# Altium PCB V2.PcbDoc (part 1 of 2)
Units mm, origin at the board's own origin, x right, y up, seen from the top; angles counter-clockwise.
Board outline 100.28 x 60.38 mm, 2 copper layers (Top Layer, Bottom Layer); 71 components, 64 nets, 307 pads, 74 vias.
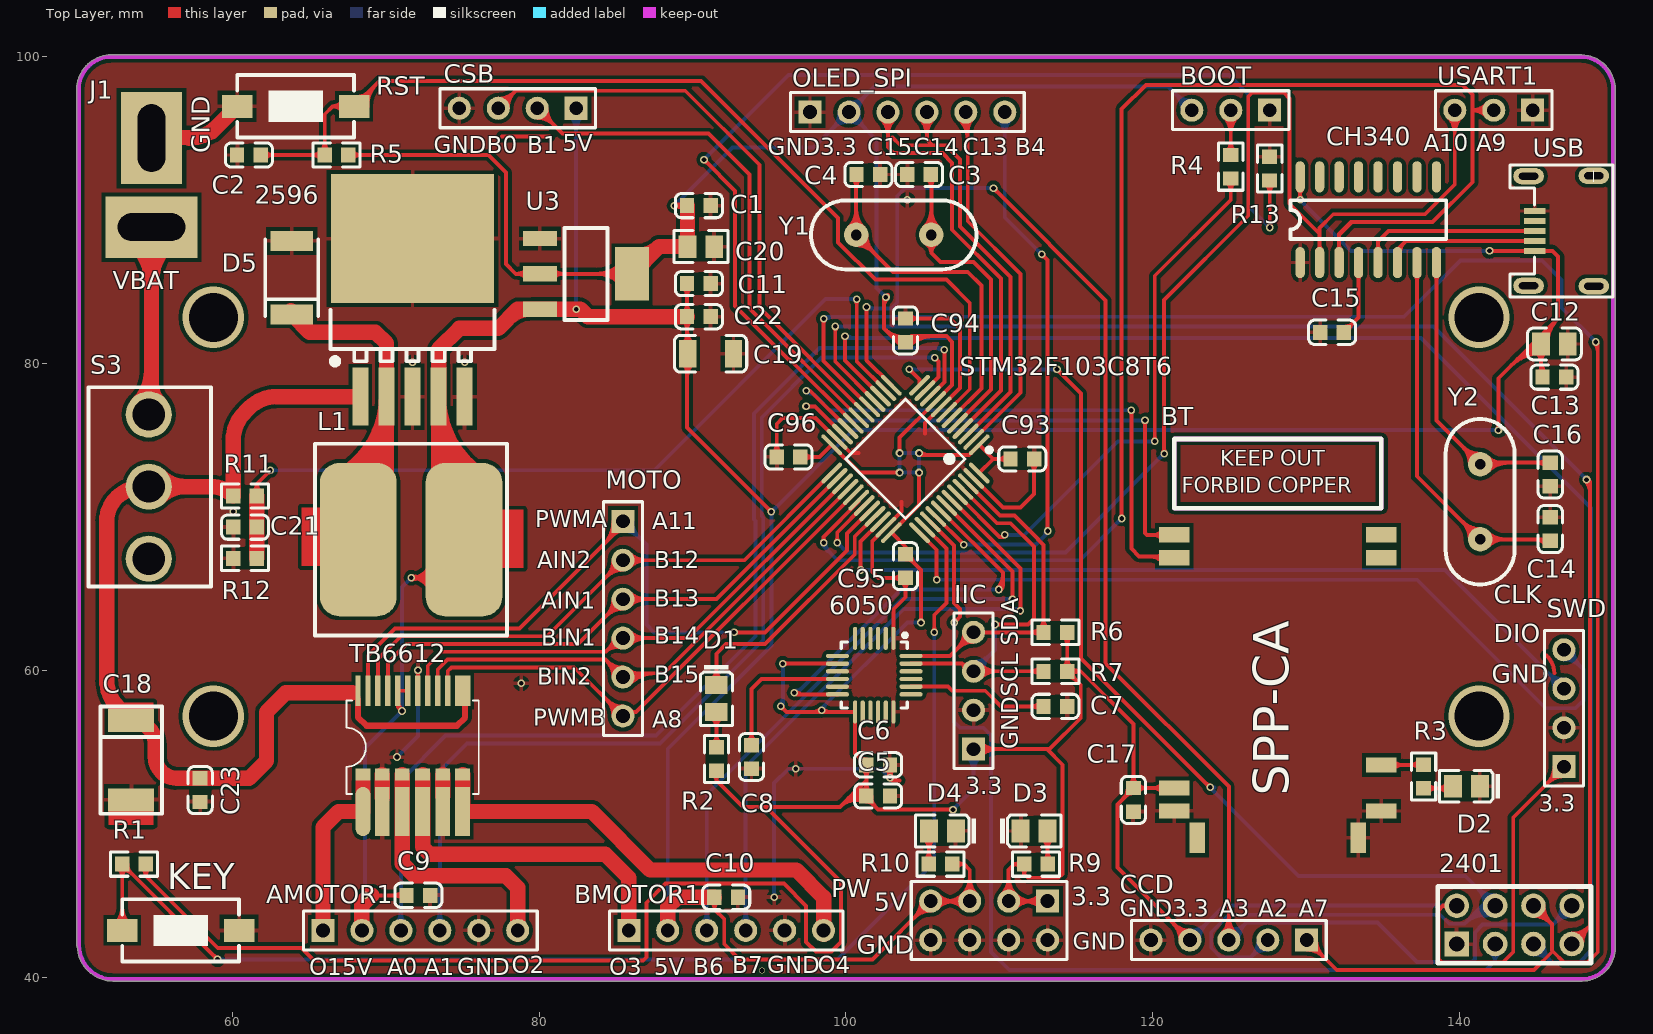
[diagram p0: Top Layer view]
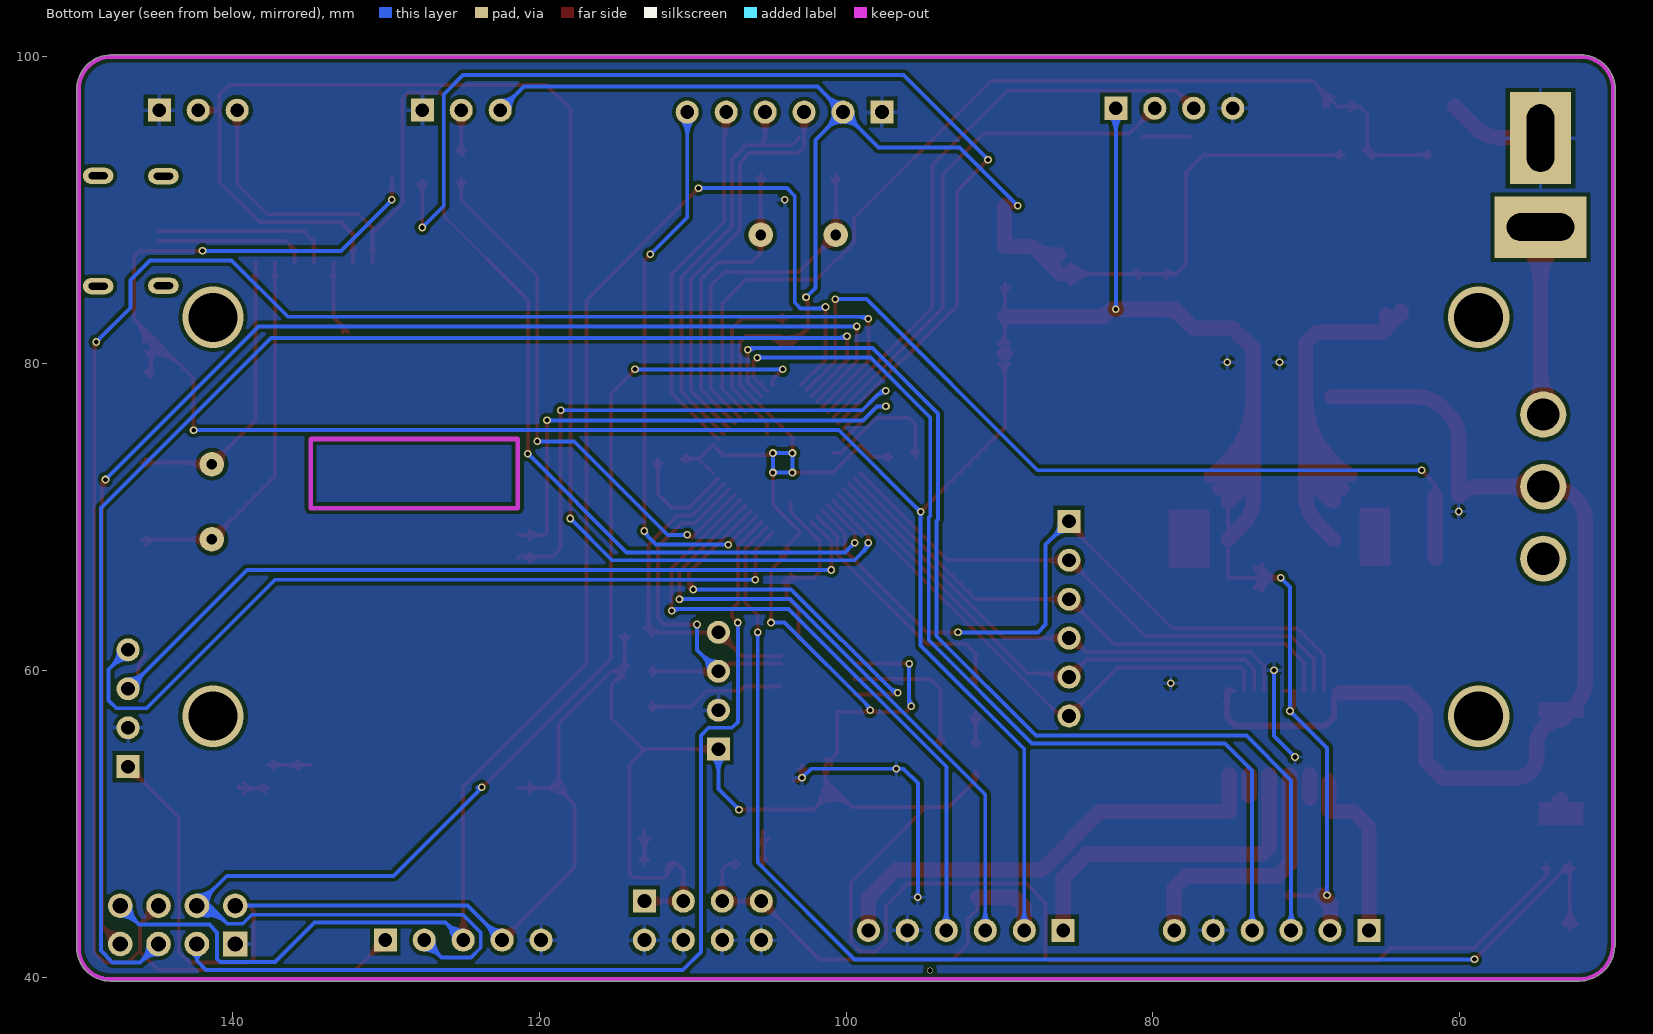
[diagram p1: Bottom Layer view, seen from below]
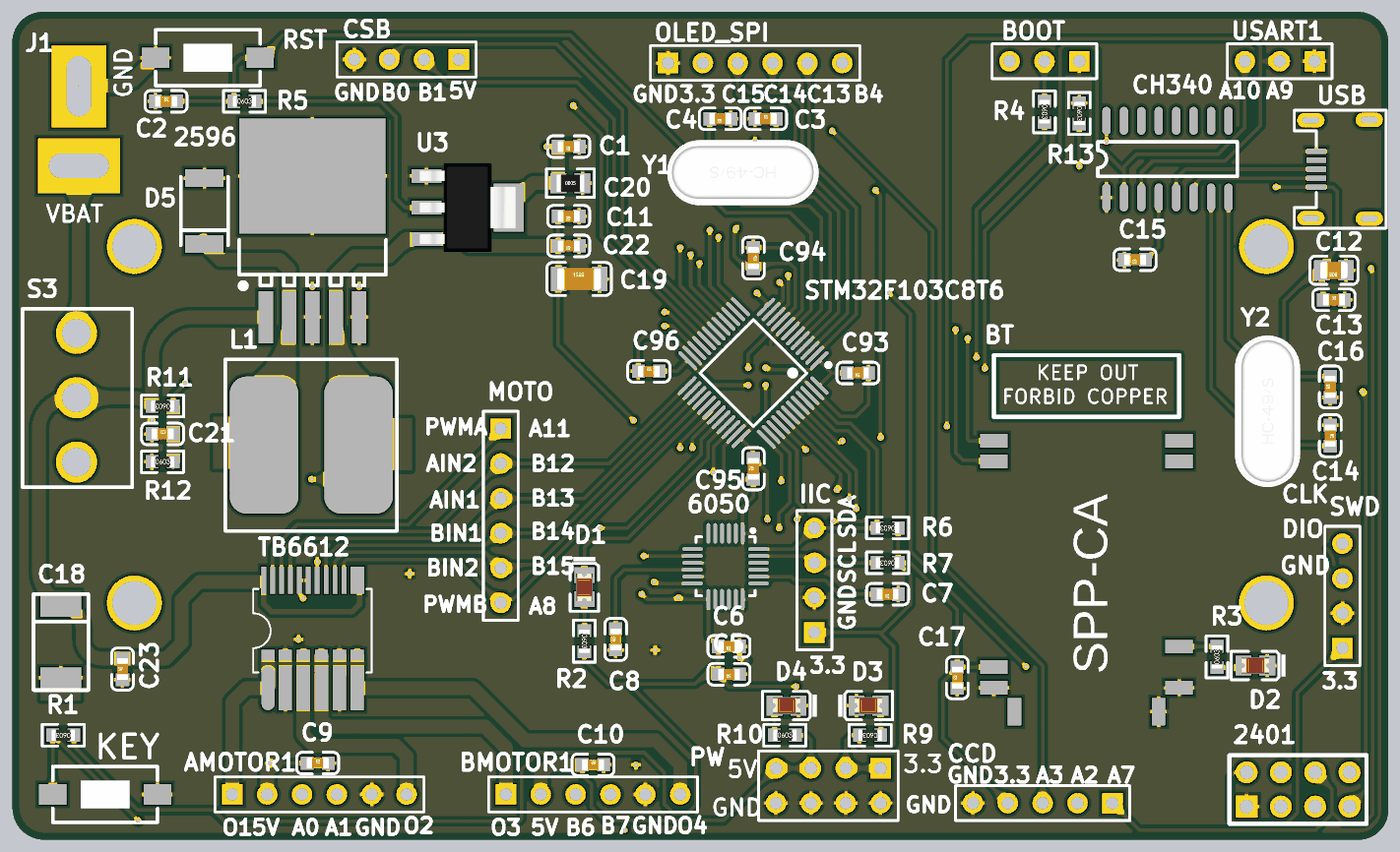
[diagram p3: 3D render of the assembled board from above, using the file's embedded part models]

## Layer stack, top to bottom
Top Layer: signal copper 0.0356
Dielectric: dielectric 0.32, FR-4, Dk 4.8
Bottom Layer: signal copper 0.0356

## Board outline
49.9,41.987 cw(c50,42.066) 49.873,42.066 49.873,97.879 cw(c52.121,97.879) 52.121,100.127 147.955,100.127 cw(c147.955,100) 147.971,100.126 cw(c147.905,97.88) 150.152,97.88 150.152,41.91 cw(c147.993,41.91) 147.993,39.751 cw(c147.993,39.878) 147.992,39.751 52.214,39.751 cw(c52.214,42.066)

## Design rules (kind name [scope] priority, off if disabled: settings)
Clearance [All] p1: gap=0.254
PolygonConnect [All] p1: connectstyle=Relief reliefconductorwidth=0.254 reliefentries=4 polygonreliefangle="90 Angle" airgapwidth=0.254
RoutingVias [All] p1: holewidth=0.3 width=0.5 viastyle="Through Hole" minholewidth=0.3 minwidth=0.5 maxholewidth=0.3 maxwidth=0.5
SolderMaskExpansion [All] p1: expansion=0.102
Width [All] p1: maxlimit=0.254 minlimit=0.254 preferedwidth=0.254
28 further rules are at their usual default settings.

## Components (designator, comment, footprint, x,y, rotation, side; value= is the part's Value field where it differs from the comment)
2401 "NRF24L01" LC-HDR2X4H 139.827,42.164 r90 top (schematic designator 1)
2596 "LM2596t-5v" LC-TO-263-5 71.755,77.851 r270 top (schematic designator 5)
6050 "MPU6050" LC-QFN-24_4x4x05P 101.854,59.69 r180 top (schematic designator 2)
AMOTOR1 "Header 6" HDR1X6 65.913,43.053 r0 top
BMOTOR1 "Header 6" HDR1X6 85.852,43.053 r0 top
BOOT "BOOT" HDR1X3 127.635,96.52 r180 top (schematic designator P1)
BT "SPP-C" SPP-C 121.412,68.834 r0 top (schematic designator BT1)
C1 "" LC-0603_C 90.424,90.297 r180 top
C2 "1uF" LC-0603_C 61.087,93.599 r0 top
C3 "" LC-0603_C 104.775,92.329 r0 top
C4 "" LC-0603_C 101.473,92.329 r180 top
C5 "" LC-0603_C 102.108,51.816 r180 top
C6 "" LC-0603_C 102.108,53.848 r180 top
C7 "" LC-0603_C 113.665,57.658 r180 top
C8 "" LC-0603_C 93.853,54.356 r90 top
C9 "0.1uf" LC-0603_C 72.136,45.339 r0 top
C10 "0.1uf" LC-0603_C 92.202,45.212 r0 top
C11 "0.1uf" LC-0603_C 90.424,85.217 r180 top
C12 "" LC-0805_C 146.191,81.28 r180 top
C13 "" LC-0603_C 146.191,79.121 r0 top
C14 "" LC-0603_C 145.923,69.215 r270 top
C15 "" LC-0603_C 131.699,82.042 r180 top
C16 "" LC-0603_C 145.923,72.771 r90 top
C17 "0.1uf" LC-0603_C 118.745,51.562 r90 top
C18 "Cap Pol1" 100UF钽电容 54.61,57.658 r270 top
C19 "Cap Pol1" LC-1206_C 91.186,80.645 r0 top
C20 "22uf" LC-0805_R 90.551,87.63 r0 top
C21 "0.1uf" LC-0603_C 60.833,69.342 r0 top
C22 "0.1uf" LC-0603_C 90.424,83.058 r180 top
C23 "0.1uf" LC-0603_C 57.912,52.197 r90 top
C93 "Cap" LC-0603_C 111.506,73.787 r180 top
C94 "Cap" LC-0603_C 103.886,82.169 r270 top
C95 "Cap" LC-0603_C 103.886,66.802 r90 top
C96 "Cap" LC-0603_C 96.266,73.914 r0 top
CCD "Header 5" HDR1X5 130.048,42.418 r180 top (schematic designator CCD1)
CH340 "CH340G" SO-16 133.985,86.233 r90 top (schematic designator 4)
CSB "Header 4" HDR1X4 82.423,96.647 r180 top (schematic designator CSB1)
D1 "LED0" LC-0805_LED_S1 91.567,58.166 r270 top
D2 "LED0" LC-0805_LED_S1 140.462,52.451 r180 top
D3 "LED0" LC-0805_LED_S1 112.268,49.53 r0 top
D4 "LED0" LC-0805_LED_S1 106.299,49.53 r180 top
D5 "ES2D" LC-DO-213AB 63.881,85.598 r90 top
IIC "SWD" HDR1X4 108.331,54.864 r90 top (schematic designator SWD1)
J1 "Header 2" VBAT 54.737,88.9 r90 top
KEY "SW-PB" KEY 56.642,43.053 r0 top (schematic designator S1)
L1 "33UH" 330电感 65.405,73.66 r0 top
MOTO "Header 6" HDR1X6 85.471,69.723 r270 top
OLED_SPI "Header 6" HDR1X6 97.663,96.393 r0 top (schematic designator OLED1)
PW "Header 4X2" HDR2X4 113.157,44.958 r180 top
R1 "10K" LC-0603_R 53.594,47.371 r180 top
R2 "" LC-0603_R 91.567,54.229 r270 top
R3 "" LC-0603_R 137.668,53.086 r90 top
R4 "" LC-0603_R 125.095,92.837 r270 top
R5 "10K" LC-0603_R 66.802,93.599 r0 top
R6 "" LC-0603_R 113.665,62.484 r180 top
R7 "" LC-0603_R 113.665,59.944 r180 top
R9 "" LC-0603_R 112.395,47.371 r180 top
R10 "" LC-0603_R 106.172,47.371 r0 top
R11 "10K" LC-0603_R 60.833,71.374 r180 top
R12 "1.5K" LC-0603_R 60.833,67.31 r0 top
R13 "" LC-0603_R 127.635,92.71 r270 top
RST "SW-PB" KEY 64.135,96.774 r0 top (schematic designator S2)
S3 "SW-PB" 钮子开关 54.483,72.009 r270 top
STM32F103C8T6 "STM32F103C8T6" LC-LQFP-48_7x7x05P 103.886,73.787 r135 top (schematic designator U1)
SWD "SWD" HDR1X4 146.812,53.721 r90 top (schematic designator SWD1)
TB6612 "TB6612" TB6612 68.58,50.8 r90 top (schematic designator 3)
U3 "AMS1117_1" LC-SOT-223 83.058,85.852 r180 top
USART1 "Header 3" HDR1X3 144.78,96.52 r180 top (schematic designator CK1)
USB "USB_CONNECTOR" MINI_USB_FEMALE 144.907,88.646 r90 top (schematic designator U2)
Y1 "" LC-HC-49S 103.124,88.392 r180 top
Y2 "" LC-HC-49S 141.351,70.993 r90 top

## Footprints (in the part's own frame and the unit in brackets; to place one, negate y for a bottom-side part, rotate by r counter-clockwise, add the part's x,y. Pads: shape width x height; smd on the part's side, far side on the other; paste and mask are expansions set on the pad)
100UF钽电容 [mm]
  rect 1.5x3 smd: 1(0.914,-1.194) 2(6.096,-1.194)
  silkscreen extent 0,-3.19 7,0.81
330电感 [mm]
  rrect50% 5x10 smd: 1(2.819,-5.131) 2(9.703,-5.131)
  silkscreen extent 0,-11.38 12.5,1.12
HDR1X3 [mm] "Connector; Header; 3 Position"
  rect 1.5x1.5 hole 0.9: 1(0,0)
  round 1.5 hole 0.9: 2(2.54,0) 3(5.08,0)
  silkscreen extent -1.27,-1.27 6.35,1.27
HDR1X4 [mm] "Connector; Header; 4 Position"
  rect 1.5x1.5 hole 0.9: 1(0,0)
  round 1.5 hole 0.9: 2(2.54,0) 3(5.08,0) 4(7.62,0)
  silkscreen extent -1.27,-1.27 8.89,1.27
HDR1X5 [mm] "Connector; Header; 5 Position"
  rect 1.5x1.5 hole 0.9: 1(0,0)
  round 1.5 hole 0.9: 2(2.54,0) 3(5.08,0) 4(7.62,0) 5(10.16,0)
  silkscreen extent -1.27,-1.27 11.43,1.27
HDR1X6 [mm] "Connector; Header; 6 Position"
  rect 1.5x1.5 hole 0.9: 1(0,0)
  round 1.5 hole 0.9: 2(2.54,0) 3(5.08,0) 4(7.62,0) 5(10.16,0) 6(12.7,0)
  silkscreen extent -1.27,-1.27 13.97,1.27
HDR2X4 [mm] "Connector; Header; 4x2 Position"
  rect 1.5x1.5 hole 0.9: 1(0,0)
  round 1.5 hole 0.9: 2(0,2.54) 3(2.54,0) 4(2.54,2.54) 5(5.08,0) 6(5.08,2.54) 7(7.62,0) 8(7.62,2.54)
  silkscreen extent -1.27,-1.27 8.89,3.81
KEY [mm]
  rect 2x1.5 smd: 1(-3.81,0) 2(3.81,0)
  silkscreen extent -3.81,-2.03 3.81,2.03
LC-0603_C [mm]
  rect 0.93x0.98 smd: 1(-0.77,0) 2(0.77,0)
  silkscreen extent -1.54,-0.79 1.54,0.79, body extent -0.8,-0.4 0.8,0.4, height 0.3
LC-0603_R [mm]
  rect 0.93x0.98 smd: 1(-0.77,0) 2(0.77,0)
  silkscreen extent -1.54,-0.79 1.54,0.79, body extent -0.85,-0.4 0.85,0.4, height 0.56
LC-0805_C [mm]
  rect 1.16x1.47 smd: 1(-0.875,0) 2(0.875,0)
  silkscreen extent -1.76,-1.03 1.76,1.04, body extent -1,-0.62 1,0.63, height 0.77
LC-0805_LED_S1 [mm]
  rect 1.16x1.47 smd: 1(0.875,0) 2(-0.875,0)
  silkscreen extent -2.2,-1.03 1.75,1.03, body extent -1.01,-0.62 1.01,0.62, height 1.1
LC-0805_R [mm]
  rect 1.16x1.47 smd: 1(-0.875,0) 2(0.875,0)
  silkscreen extent -1.75,-1.03 1.75,1.03, body extent -1,-0.62 1,0.63, height 0.49
LC-1206_C [mm]
  rect 1.13x1.8 smd: 1(-1.49,0) 2(1.49,0)
  silkscreen extent -2.36,-1.2 2.35,1.2, body extent -1.6,-0.81 1.6,0.79, height 1
LC-DO-213AB [mm]
  rect 1.3x2.8 smd: 1(2.4,0) 2(-2.4,0)
  silkscreen extent -2.5,-1.73 2.5,1.73
LC-HC-49S [mm]
  round 1.6 hole 0.7: 1(-2.45,0) 2(2.45,0)
  silkscreen extent -5.39,-2.25 5.39,2.25, body extent -5.39,-2.27 5.41,2.23, height 3.6
LC-HDR2X4H [mm]
  rect 1.6x1.6 hole 1: 1(0,0)
  round 1.6 hole 1: 2(2.5,0) 3(0,-2.5) 4(2.5,-2.5) 5(0,-5) 6(2.5,-5) 7(0,-7.5) 8(2.5,-7.5)
  silkscreen extent -1.25,-8.75 3.75,1.25
LC-LQFP-48_7x7x05P [mm]
  oval 0.28x1.8 smd mask+0.051: 1(-2.75,-4.05) 2(-2.25,-4.05) 3(-1.75,-4.05) 4(-1.25,-4.05) 5(-0.75,-4.05) 6(-0.25,-4.05) 7(0.25,-4.05) 8(0.75,-4.05) 9(1.25,-4.05) 10(1.75,-4.05) 11(2.25,-4.05) 12(2.75,-4.05) 25(2.75,4.05) 26(2.25,4.05) 27(1.75,4.05) 28(1.25,4.05) 29(0.75,4.05) 30(0.25,4.05) 31(-0.25,4.05) 32(-0.75,4.05) 33(-1.25,4.05) 34(-1.75,4.05) 35(-2.25,4.05) 36(-2.75,4.05)
  oval 1.8x0.28 smd mask+0.051: 13(4.05,-2.75) 14(4.05,-2.25) 15(4.05,-1.75) 16(4.05,-1.25) 17(4.05,-0.75) 18(4.05,-0.25) 19(4.05,0.25) 20(4.05,0.75) 21(4.05,1.25) 22(4.05,1.75) 23(4.05,2.25) 24(4.05,2.75) 37(-4.05,2.75) 38(-4.05,2.25) 39(-4.05,1.75) 40(-4.05,1.25) 41(-4.05,0.75) 42(-4.05,0.25) 43(-4.05,-0.25) 44(-4.05,-0.75) 45(-4.05,-1.25) 46(-4.05,-1.75) 47(-4.05,-2.25) 48(-4.05,-2.75)
  silkscreen extent -3.6,-4.42 2.75,2.75
LC-QFN-24_4x4x05P [mm]
  oval 0.28x1.5 smd mask+0.051: 1(-1.25,-2.4) 2(-0.75,-2.4) 3(-0.25,-2.4) 4(0.25,-2.4) 5(0.75,-2.4) 6(1.25,-2.4) 13(1.25,2.4) 14(0.75,2.4) 15(0.25,2.4) 16(-0.25,2.4) 17(-0.75,2.4) 18(-1.25,2.4)
  oval 1.5x0.28 smd mask+0.051: 7(2.4,-1.25) 8(2.4,-0.75) 9(2.4,-0.25) 10(2.4,0.25) 11(2.4,0.75) 12(2.4,1.25) 19(-2.4,1.25) 20(-2.4,0.75) 21(-2.4,0.25) 22(-2.4,-0.25) 23(-2.4,-0.75) 24(-2.4,-1.25)
  silkscreen extent -2.15,-2.72 2.15,2.15
LC-SOT-223 [mm]
  rect 2.2x1 smd: 1(3,-2.3) 2(3,0) 3(3,2.3)
  rect 2.2x3.5 smd: 2(-3,0)
  silkscreen extent -1.4,-3 1.4,3, body extent -3.49,-3.24 3.49,3.24, height 1.64
LC-TO-263-5 [mm]
  rect 8.4x10.65 smd: 0(-10.3,0)
  rect 3.8x1.05 smd: 1(0,-3.4) 2(0,-1.7) 3(0,0) 4(0,1.7) 5(0,3.4)
  silkscreen extent -5.65,-5.35 -2.1,5.35
MINI_USB_FEMALE [mm]
  rect 0.4x1.4 smd: 1(-1.3,0) 2(-0.65,0) 3(0,0) 4(0.65,0) 5(1.3,0)
  oval 1.05x2 hole 0.45 slot 1.25 at 90 deg: 6(-3.57,0.4) 7(-3.6,-3.86) 8(3.6,-3.86) 9(3.57,0.4)
  silkscreen extent -4.3,-5.1 4.3,1.6
SO-16 [mil]
  oval 80x24 smd: 1(14,172) 2(14,122) 3(14,72) 4(14,22) 5(14,-28) 6(14,-78) 7(14,-128) 8(14,-178) 9(234,-178) 10(234,-128) 11(234,-78) 12(234,-28) 13(234,22) 14(234,72) 15(234,122) 16(234,172)
  silkscreen extent 74,-203 174,197
SPP-C [mm]
  rect 2x1 smd: 1(0,0) 2(0,-1.5) 12(0,-16.5) 13(0,-18) 22(13.5,-18) 24(13.5,-15) 33(13.5,-1.5) 34(13.5,0)
  rect 1x2 smd: 14(1.5,-19.75) 21(12,-19.75)
  Keep-Out Layer lines w0.3: 0,1.75 13.5,1.75 13.5,6.25 0,6.25 0,1.75
  silkscreen extent 0,1.75 13.5,6.25
TB6612 [mm]
  oval 3.2x0.96 smd: 1(0,0.056)
  rect 0.8x0.96 smd: 2(2.413,0.056) 4(2.413,-1.192) 6(2.413,-2.511) 8(2.413,-3.831) 10(2.413,-5.15) 12(2.413,-6.439)
  rect 3.2x0.96 smd: 3(0,-1.192) 5(0,-2.511) 7(0,-3.831) 9(0,-5.15) 11(0,-6.439)
  rect 2x0.7 smd: 13(7.874,-6.604)
  rect 2x0.35 smd: 14(7.874,-6.119) 15(7.874,-5.469) 16(7.874,-4.819) 17(7.874,-4.169) 18(7.874,-3.519) 19(7.874,-2.869) 20(7.874,-2.219) 21(7.874,-1.569) 22(7.874,-0.919) 23(7.874,-0.269) 24(7.874,0.381)
  silkscreen extent 1.14,-7.49 7.24,1.14
VBAT [mm]
  rect 4x6 hole 1.8 slot 4.4 at 90 deg: 1(0,0)
  rect 6x4 hole 1.8 slot 4.4 at 0 deg: 2(5.8,0)
钮子开关 [mm]
  round 3 hole 2.1: 1(-4.674,0.076) 2(0.025,0.076) 3(4.724,0.076)
  silkscreen extent -6.45,-3.86 6.55,4.14

## Part data
2401: library part "Header 4X2H", "Header, 4-Pin, Dual row, Right Angle"
2596: library part LM2576, "Simple Switcher 3A Step Down Voltage Regulator"
6050: "9轴运动处理传感器"
AMOTOR1 BMOTOR1 MOTO OLED_SPI: "Header, 6-Pin"
BOOT: library part "Header 3", "Header, 3-Pin"
BT: "sppc"
C1 C3 C4 C12 C13 C14 C15 C16: library part C
C2: library part C_1
C5 C6 C7 C8: library part Cap, "Capacitor"
C9 C10 C11 C17 C21 C22 C23: library part cap
C18 C19: "Polarized Capacitor (Radial)"
C20: library part "Cap Pol2", "Polarized Capacitor (Axial)"
C93 C94 C95 C96: "Capacitor"
CCD: "Header, 5-Pin"
CSB: "Header, 4-Pin"
D1 D2 D3 D4: "Typical INFRARED GaAs LED"
D5: library part DIODE
IIC SWD: library part "Header 4", "Header, 4-Pin"
J1: "Header, 2-Pin"
KEY RST S3: "Switch"
L1: library part Inductor
PW: "Header, 4-Pin, Dual row"
R1 R2 R3 R5 R6 R7 R9 R10: library part R_1
R4 R13: library part R
R11 R12: library part res
STM32F103C8T6: "STM32 ARM-based 32-bit MCU with 64 Kbytes Flash, 48-pin LQFP, Industrial Temperature"
U3: "3.3V电压转换器AMS1117"
USART1: "Header, 3-Pin"
Y1 Y2: library part XTAL, "Crystal Oscillator"

## Via types
v1: diameter 0.5, hole 0.3, Top Layer to Bottom Layer, 69 vias
v2: diameter 4, hole 3.2, Top Layer to Bottom Layer, 4 vias
v3: diameter 0.4, hole 0.3, Top Layer to Bottom Layer, 1 vias

## Nets (pads, with @x,y where several pads share a name; then routed paths per layer and width w, separated by ;. In a path a pad name is that pad's centre, name@x,y a point inside that pad or via, vN(x,y) a via of type N, cw(c..) or ccw(c..) an arc to the next point about the centre after c; other vN are vias at no path point)
5V: 
12V: 2596.1 C18.1 C23.2 R11.2 S3.2 TB6612.13 TB6612.14 TB6612.24 | length 210.6
  Top Layer w0.254: TB6612.24@68.199,58.166 67.818,58.547 67.818,58.623 68.199,58.623 TB6612.24@68.199,58.674 ; TB6612.13@75.184,58.674 TB6612.14@74.699,58.674 ; TB6612.14@74.699,58.674 cw(c74.699,58.258) 75.015,58.529 ccw(c74.699,58.258) TB6612.14@74.699,58.674 ; TB6612.14@74.699,58.674 ccw(c74.699,59.09) 75.015,58.819 cw(c74.699,59.09) TB6612.14@74.699,58.674 ; 75.184,57.486 cw(c75.722,57.486) 75.342,57.866 ccw(c75.722,57.486) 75.184,57.486 ; 75.184,57.486 ccw(c74.646,57.486) 75.026,57.866 cw(c74.646,57.486) 75.184,57.486 ; 67.96,58.623 ccw(c67.96,58.913) 68.165,58.708 cw(c67.96,58.913) 67.96,58.623
  Top Layer w0.4: TB6612.24@68.199,58.166 68.199,56.947 68.758,56.388 74.651,56.388 75.184,56.921 TB6612.13@75.184,58.674
  Top Layer w1: 67.818,58.547 63.5,58.547 62.23,57.277 62.23,54.102 61.095,52.967 C23.2@57.912,52.967 56.38,52.967 ; 2596.1@68.355,77.851 62.901,77.851 ; 51.816,59.396 ccw(c54.356,59.396) 52.56,57.6 ; 51.816,59.396 ccw(c54.356,59.396) 52.56,57.6 ; 51.816,59.396 ccw(c54.356,59.396) 52.56,57.6 ; 51.816,59.396 ccw(c54.356,59.396) 52.56,57.6 ; 51.816,59.396 ccw(c54.356,59.396) 52.56,57.6 ; 51.816,59.396 ccw(c54.356,59.396) 52.56,57.6 ; 51.816,59.396 ccw(c54.356,59.396) 52.56,57.6 ; 51.816,59.396 ccw(c54.356,59.396) 52.56,57.6 ; 51.816,59.396 51.816,69.724 ; 51.816,59.396 51.816,69.724 ; 51.816,69.724 cw(c53.959,69.724) 52.444,71.24 ; 51.816,69.724 cw(c53.959,69.724) 52.444,71.24 ; 51.816,69.724 cw(c53.959,69.724) 52.444,71.24 ; 51.816,69.724 cw(c53.959,69.724) 52.444,71.24 ; 51.816,69.724 cw(c53.959,69.724) 52.444,71.24 ; 51.816,69.724 cw(c53.959,69.724) 52.444,71.24 ; 51.816,69.724 cw(c53.959,69.724) 52.444,71.24 ; 51.816,69.724 cw(c53.959,69.724) 52.444,71.24 ; 52.444,71.24 cw(c54.24,69.444) S3.2@54.24,71.984 ; 52.444,71.24 cw(c54.24,69.444) S3.2@54.24,71.984 ; 52.444,71.24 cw(c54.24,69.444) S3.2@54.24,71.984 ; 52.444,71.24 cw(c54.24,69.444) S3.2@54.24,71.984 ; 52.444,71.24 cw(c54.24,69.444) S3.2@54.24,71.984 ; 52.444,71.24 cw(c54.24,69.444) S3.2@54.24,71.984 ; 52.444,71.24 cw(c54.24,69.444) S3.2@54.24,71.984 ; 52.444,71.24 cw(c54.24,69.444) S3.2@54.24,71.984 ; 52.56,57.6 C18.1@53.416,56.744 ; C18.1@53.416,56.744 cw(c53.416,55.169) 54.991,55.169 ; C18.1@53.416,56.744 cw(c53.416,55.169) 54.991,55.169 ; C18.1@53.416,56.744 cw(c53.416,55.169) 54.991,55.169 ; C18.1@53.416,56.744 cw(c53.416,55.169) 54.991,55.169 ; C18.1@53.416,56.744 cw(c53.416,55.169) 54.991,55.169 ; C18.1@53.416,56.744 cw(c53.416,55.169) 54.991,55.169 ; C18.1@53.416,56.744 cw(c53.416,55.169) 54.991,55.169 ; C18.1@53.416,56.744 cw(c53.416,55.169) 54.991,55.169 ; S3.2@54.24,71.984 S3.2@54.559,71.984 ; S3.2@54.559,71.984 58.591,71.984 ; S3.2@54.559,71.984 58.591,71.984 ; 54.991,54.356 ccw(c56.38,54.356) 56.38,52.967 ; 54.991,54.356 ccw(c56.38,54.356) 56.38,52.967 ; 54.991,54.356 ccw(c56.38,54.356) 56.38,52.967 ; 54.991,54.356 ccw(c56.38,54.356) 56.38,52.967 ; 54.991,54.356 ccw(c56.38,54.356) 56.38,52.967 ; 54.991,54.356 ccw(c56.38,54.356) 56.38,52.967 ; 54.991,54.356 ccw(c56.38,54.356) 56.38,52.967 ; 54.991,54.356 ccw(c56.38,54.356) 56.38,52.967 ; 54.991,54.356 54.991,55.169 ; 56.973,71.984 cw(c56.973,74.398) 55.266,72.691 ccw(c56.973,74.398) 56.973,71.984 ; 56.973,71.984 ccw(c56.973,69.569) 55.266,71.276 cw(c56.973,69.569) 56.973,71.984 ; 58.591,71.984 cw(c58.591,69.902) R11.2@60.063,71.374 ; 58.591,71.984 cw(c58.591,69.902) R11.2@60.063,71.374 ; 58.591,71.984 cw(c58.591,69.902) R11.2@60.063,71.374 ; 58.591,71.984 cw(c58.591,69.902) R11.2@60.063,71.374 ; 58.591,71.984 cw(c58.591,69.902) R11.2@60.063,71.374 ; 58.591,71.984 cw(c58.591,69.902) R11.2@60.063,71.374 ; 58.591,71.984 cw(c58.591,69.902) R11.2@60.063,71.374 ; 58.591,71.984 cw(c58.591,69.902) R11.2@60.063,71.374 ; R11.2@60.063,71.374 60.063,75.013 ; R11.2@60.063,71.374 60.063,75.013 ; 60.063,75.013 cw(c62.603,75.013) 60.807,76.809 ; 60.063,75.013 cw(c62.603,75.013) 60.807,76.809 ; 60.063,75.013 cw(c62.603,75.013) 60.807,76.809 ; 60.063,75.013 cw(c62.603,75.013) 60.807,76.809 ; 60.063,75.013 cw(c62.603,75.013) 60.807,76.809 ; 60.063,75.013 cw(c62.603,75.013) 60.807,76.809 ; 60.063,75.013 cw(c62.603,75.013) 60.807,76.809 ; 60.063,75.013 cw(c62.603,75.013) 60.807,76.809 ; 60.807,76.809 61.105,77.107 ; 61.105,77.107 cw(c62.901,75.311) 62.901,77.851 ; 61.105,77.107 cw(c62.901,75.311) 62.901,77.851 ; 61.105,77.107 cw(c62.901,75.311) 62.901,77.851 ; 61.105,77.107 cw(c62.901,75.311) 62.901,77.851 ; 61.105,77.107 cw(c62.901,75.311) 62.901,77.851 ; 61.105,77.107 cw(c62.901,75.311) 62.901,77.851 ; 61.105,77.107 cw(c62.901,75.311) 62.901,77.851 ; 61.105,77.107 cw(c62.901,75.311) 62.901,77.851
AIN1: MOTO.3 STM32F103C8T6.26 TB6612.21 | length 43.6
  Top Layer w0.254: TB6612.21@70.149,58.674 70.149,60.497 71.374,61.722 82.55,61.722 MOTO.3@85.471,64.643 91.56,64.643 STM32F103C8T6.26@99.431,72.514 ; MOTO.3@84.848,64.643 cw(c83.344,64.643) 84.407,63.579 cw(c85.471,62.516) MOTO.3@85.471,64.02 ; MOTO.3@85.102,64.643 cw(c84.211,64.643) 84.841,64.013 cw(c85.471,63.383) MOTO.3@85.471,64.274 ; MOTO.3@85.732,64.382 cw(c86.362,63.752) 86.362,64.643 cw(c86.362,65.534) MOTO.3@85.732,64.904 ; MOTO.3@85.912,64.202 cw(c86.975,63.139) 86.975,64.643 cw(c86.975,66.147) MOTO.3@85.912,65.084
AIN2: MOTO.2 STM32F103C8T6.25 TB6612.22 | length 44.2
  Top Layer w0.254: TB6612.22@69.499,58.674 69.499,60.736 70.993,62.23 80.518,62.23 MOTO.2@85.471,67.183 93.393,67.183 STM32F103C8T6.25@99.078,72.868 ; MOTO.2@84.848,67.183 cw(c83.344,67.183) 84.407,66.119 cw(c85.471,65.056) MOTO.2@85.471,66.56 ; MOTO.2@85.102,67.183 cw(c84.211,67.183) 84.841,66.553 cw(c85.471,65.923) MOTO.2@85.471,66.814 ; MOTO.2@85.732,66.922 cw(c86.362,66.292) 86.362,67.183 cw(c86.362,68.074) MOTO.2@85.732,67.444 ; MOTO.2@85.912,66.742 cw(c86.975,65.679) 86.975,67.183 cw(c86.975,68.687) MOTO.2@85.912,67.624
BIN1: MOTO.4 STM32F103C8T6.27 TB6612.17 | length 39.9
  Top Layer w0.254: TB6612.17@72.749,58.674 72.749,60.303 73.66,61.214 84.328,61.214 ; 84.587,61.473 ccw(c83.957,62.103) MOTO.4@84.848,62.103 ; 84.65,61.536 cw(c85.204,60.981) MOTO.4@85.386,61.744 ; MOTO.4@85.327,61.497 ccw(c85.081,60.461) 84.328,61.214 ; MOTO.4@85.732,61.842 cw(c86.362,61.212) 86.362,62.103 cw(c86.362,62.994) MOTO.4@85.732,62.364 ; MOTO.4@85.912,61.662 cw(c86.975,60.599) 86.975,62.103 cw(c86.975,63.607) MOTO.4@85.912,62.544 ; STM32F103C8T6.27@99.785,72.161 89.727,62.103 MOTO.4@85.471,62.103 85.217,62.103 84.328,61.214
BIN2: MOTO.5 STM32F103C8T6.28 TB6612.16 | length 42.3
  Top Layer w0.254: TB6612.16@73.399,58.674 73.399,60.064 74.041,60.706 84.328,60.706 MOTO.5@85.471,59.563 85.725,59.817 88.148,59.817 STM32F103C8T6.28@100.138,71.807 ; MOTO.5@84.848,59.563 ccw(c83.344,59.563) 84.407,60.627 ccw(c85.471,61.69) MOTO.5@85.471,60.186 ; MOTO.5@85.102,59.563 ccw(c84.211,59.563) 84.841,60.193 ccw(c85.471,60.823) MOTO.5@85.471,59.932 ; MOTO.5@85.552,59.482 cw(c86.362,58.672) 86.362,59.817 cw(c86.362,60.454) MOTO.5@85.912,60.004 ; MOTO.5@85.732,59.302 cw(c86.975,58.059) 86.975,59.817 ; MOTO.5@85.912,59.122 cw(c87.588,57.446) 87.588,59.817
BOOT0: R4.2 STM32F103C8T6.44 | length 39.8
  Top Layer w0.254: STM32F103C8T6.44@107.28,71.454 110.027,68.707 110.236,68.707 v1(110.363,68.834) ; v1(120.142,74.93) 120.142,85.725 125.095,90.678 R4.2@125.095,92.067 ; R4.2@124.856,91.828 cw(c124.279,91.251) 125.095,91.251 cw(c125.911,91.251) R4.2@125.334,91.828 ; 120.142,75.227 cw(c119.845,75.227) 120.055,75.017 ccw(c119.845,75.227) 120.142,75.227 ; 120.142,75.227 ccw(c120.439,75.227) 120.229,75.017 cw(c120.439,75.227) 120.142,75.227
  Bottom Layer w0.254: v1(110.363,68.834) 111.633,68.834 117.729,74.93 v1(120.142,74.93) ; 110.66,68.834 cw(c110.66,69.131) 110.45,68.921 ccw(c110.66,69.131) 110.66,68.834 ; 110.66,68.834 ccw(c110.66,68.537) 110.45,68.747 cw(c110.66,68.537) 110.66,68.834 ; 119.845,74.93 cw(c119.845,74.633) 120.055,74.843 ccw(c119.845,74.633) 119.845,74.93 ; 119.845,74.93 ccw(c119.845,75.227) 120.055,75.017 cw(c119.845,75.227) 119.845,74.93
BOOT1: R13.2 STM32F103C8T6.20 | length 76.9
  Top Layer w0.254: v1(90.754,93.294) 92.786,91.262 92.786,83.744 96.266,80.264 96.348,80.264 STM32F103C8T6.20@100.492,76.12 ; R13.2@127.396,91.701 cw(c126.819,91.124) 127.635,91.124 cw(c128.451,91.124) R13.2@127.874,91.701 ; v1(127.635,88.875) R13.2@127.635,91.94 ; 90.964,93.084 cw(c91.174,93.294) 90.877,93.294 ccw(c91.174,93.294) 90.964,93.084 ; 90.964,93.084 ccw(c90.754,92.874) 90.754,93.171 cw(c90.754,92.874) 90.964,93.084 ; 127.635,89.172 cw(c127.338,89.172) 127.548,88.962 ccw(c127.338,89.172) 127.635,89.172 ; 127.635,89.172 ccw(c127.932,89.172) 127.722,88.962 cw(c127.932,89.172) 127.635,89.172
  Bottom Layer w0.254: v1(90.754,93.294) 96.266,98.806 124.968,98.806 126.238,97.536 126.238,90.272 v1(127.635,88.875) ; 90.964,93.504 cw(c90.754,93.714) 90.754,93.417 ccw(c90.754,93.714) 90.964,93.504 ; 90.964,93.504 ccw(c91.174,93.294) 90.877,93.294 cw(c91.174,93.294) 90.964,93.504 ; 127.425,89.085 cw(c127.215,88.875) 127.512,88.875 ccw(c127.215,88.875) 127.425,89.085 ; 127.425,89.085 ccw(c127.635,89.295) 127.635,88.998 cw(c127.635,89.295) 127.425,89.085
DGND: 
GND: 2401.1 2596.0 2596.3 2596.5 6050.1 6050.9 6050.11 6050.18 AMOTOR1.5 BMOTOR1.5 BOOT.1 BT.13 BT.21 BT.22 C1.1 C2.1 C3.1 C4.1 C5.1 C6.1 C7.1 C8.1 C9.2 C10.2 C11.1 C12.1 C13.2 C14.1 C15.2 C16.1 C17.1 C18.2 C19.2 C20.2 C21.1 C22.1 C23.1 C93.1 C94.1 C95.1 C96.1 CCD.5 CH340.1 CSB.4 D2.2 D3.2 D4.2 D5.1 IIC.2 J1.2 KEY.2 OLED_SPI.1 PW.2 PW.4 PW.6 PW.8 R12.1 R13.1 RST.1 STM32F103C8T6.8 STM32F103C8T6.23 STM32F103C8T6.35 STM32F103C8T6.47 SWD.2 TB6612.3 TB6612.4 TB6612.9 TB6612.10 TB6612.18 U3.1 USART1.1 USB.5 | length 113.6
  Top Layer w0.254: TB6612.18@72.099,58.674 v1@72.099,60.009 ; C96.1@95.496,73.914 95.496,76.065 95.885,76.454 98.037,76.454 STM32F103C8T6.23@99.431,75.06 100.323,74.168 100.838,74.168 ; C6.1@102.878,53.848 v1(102.878,53.01) ; v1@102.946,52.907 cw(c103.082,52.702) 103.228,52.9 ; 6050.1@103.104,62.09 103.104,63.988 103.886,64.77 C95.1@103.886,66.032 102.116,66.032 101.727,66.421 101.727,68.446 STM32F103C8T6.35@102.613,69.332 103.632,70.351 103.632,70.993 ; C94.1@103.886,82.939 106.799,82.939 107.442,82.296 107.442,78.404 STM32F103C8T6.8@106.219,77.181 105.156,76.118 105.156,75.438 ; STM32F103C8T6.47@108.341,72.514 108.352,72.514 110.254,70.612 111.379,70.612 112.276,71.509 C93.1@112.276,73.787 ; 95.496,74.755 cw(c94.68,74.755) 95.257,74.178 ccw(c94.68,74.755) 95.496,74.755 ; 95.496,74.755 ccw(c96.312,74.755) 95.735,74.178 cw(c96.312,74.755) 95.496,74.755 ; v1@102.771,53.071 ccw(c102.514,53.22) 102.801,53.297 ; v1@102.771,53.071 ccw(c102.514,53.22) 102.801,53.297 ; v1@102.771,53.071 ccw(c102.514,53.22) 102.801,53.297 ; 102.801,53.297 ccw(c103.088,53.373) v1@102.939,53.116 ; 102.801,53.297 ccw(c103.088,53.373) v1@102.939,53.116 ; 102.801,53.297 ccw(c103.088,53.373) v1@102.939,53.116 ; v1@102.816,53.116 ccw(c102.668,53.373) 102.955,53.297 ; v1@102.816,53.116 ccw(c102.668,53.373) 102.955,53.297 ; v1@102.816,53.116 ccw(c102.668,53.373) 102.955,53.297 ; v1(102.878,53.01) cw(c103.687,53.01) 103.116,53.583 ccw(c103.687,53.01) v1(102.878,53.01) ; v1(102.878,53.01) ccw(c102.069,53.01) 102.64,53.583 cw(c102.069,53.01) v1(102.878,53.01) ; v1(102.878,53.01) 103.056,52.832 ; 102.878,53.307 cw(c102.581,53.307) 102.791,53.097 ccw(c102.581,53.307) 102.878,53.307 ; 102.878,53.307 ccw(c103.175,53.307) 102.965,53.097 cw(c103.175,53.307) 102.878,53.307 ; 102.955,53.297 ccw(c103.242,53.22) v1@102.984,53.071 ; 102.955,53.297 ccw(c103.242,53.22) v1@102.984,53.071 ; 102.955,53.297 ccw(c103.242,53.22) v1@102.984,53.071 ; 103.045,66.032 cw(c103.045,65.216) 103.622,65.793 ccw(c103.045,65.216) 103.045,66.032 ; 103.045,66.032 ccw(c103.045,66.848) 103.622,66.271 cw(c103.045,66.848) 103.045,66.032 ; 103.056,52.832 cw(c103.194,52.97) 103,52.995 ccw(c103.194,52.97) 103.056,52.832 ; 103.056,52.832 ccw(c102.918,52.694) 102.893,52.888 cw(c102.918,52.694) 103.056,52.832 ; 103.056,52.832 103.505,52.832 ; 103.505,52.832 cw(c103.505,53.513) 102.974,53.087 ccw(c103.505,53.513) 103.505,52.832 ; 103.886,65.216 cw(c104.702,65.216) 104.125,65.793 ccw(c104.702,65.216) 103.886,65.216 ; 103.886,65.216 ccw(c103.07,65.216) 103.647,65.793 cw(c103.07,65.216) 103.886,65.216 ; 104.727,82.939 cw(c104.727,83.755) 104.15,83.178 ccw(c104.727,83.755) 104.727,82.939 ; 104.727,82.939 ccw(c104.727,82.123) 104.15,82.7 cw(c104.727,82.123) 104.727,82.939 ; 112.276,72.946 cw(c113.092,72.946) 112.515,73.523 ccw(c113.092,72.946) 112.276,72.946 ; 112.276,72.946 ccw(c111.46,72.946) 112.037,73.523 cw(c111.46,72.946) 112.276,72.946 ; v1@72.024,59.933 cw(c71.842,59.751) 72.099,59.751 ccw(c71.842,59.751) v1@72.024,59.933 ; 72.099,59.695 cw(c72.436,59.695) 72.198,59.933 ccw(c72.436,59.695) 72.099,59.695
  Top Layer w1: C18.2@53.416,51.562 ccw(c53.551,51.562) C18.2@53.551,51.427 ; 58.669,95.118 RST.1@60.325,96.774 ; TB6612.3@69.772,51.689 TB6612.4@69.772,53.213 ; TB6612.9@73.73,51.816 TB6612.10@73.73,53.213 ; 57.199,94.7 ccw(c57.199,97.24) 58.995,95.444 ; 57.199,94.7 ccw(c57.199,97.24) 58.995,95.444 ; 57.199,94.7 ccw(c57.199,97.24) 58.995,95.444 ; 57.199,94.7 ccw(c57.199,97.24) 58.995,95.444 ; 57.199,94.7 ccw(c57.199,97.24) 58.995,95.444 ; 57.199,94.7 ccw(c57.199,97.24) 58.995,95.444 ; 57.199,94.7 ccw(c57.199,97.24) 58.995,95.444 ; 57.199,94.7 ccw(c57.199,97.24) 58.995,95.444
  Bottom Layer w0.254: v1(70.739,54.356) 72.111,55.728 v1(72.111,60.02) ; v1(95.326,45.212) 95.326,52.654 96.258,53.586 v1(96.731,53.586) 102.302,53.586 v1(102.878,53.01) ; 70.949,54.566 cw(c70.739,54.776) 70.739,54.479 ccw(c70.739,54.776) 70.949,54.566 ; 70.949,54.566 ccw(c71.159,54.356) 70.862,54.356 cw(c71.159,54.356) 70.949,54.566 ; 72.111,59.723 cw(c72.408,59.723) 72.198,59.933 ccw(c72.408,59.723) 72.111,59.723 ; 72.111,59.723 ccw(c71.814,59.723) 72.024,59.933 cw(c71.814,59.723) 72.111,59.723 ; 95.326,45.509 cw(c95.029,45.509) 95.239,45.299 ccw(c95.029,45.509) 95.326,45.509 ; 95.326,45.509 ccw(c95.623,45.509) 95.413,45.299 cw(c95.623,45.509) 95.326,45.509 ; 96.434,53.586 cw(c96.434,53.289) 96.644,53.499 ccw(c96.434,53.289) 96.434,53.586 ; 96.434,53.586 ccw(c96.434,53.883) 96.644,53.673 cw(c96.434,53.883) 96.434,53.586 ; 97.028,53.586 cw(c97.028,53.883) 96.818,53.673 ccw(c97.028,53.883) 97.028,53.586 ; 97.028,53.586 ccw(c97.028,53.289) 96.818,53.499 cw(c97.028,53.289) 97.028,53.586 ; 102.668,53.22 cw(c102.458,53.01) 102.755,53.01 ccw(c102.458,53.01) 102.668,53.22 ; 102.668,53.22 ccw(c102.878,53.43) 102.878,53.133 cw(c102.878,53.43) 102.668,53.22
  other v1: 78.842,59.157 60.071,70.358 71.755,80.086 75.155,80.086 104.005,90.678
INT: 6050.12 STM32F103C8T6.41 | length 31.1
  Top Layer w0.254: v1(96.647,58.547) 96.774,58.547 96.774,58.42 96.794,58.44 6050.12@99.454,58.44 ; v1@96.736,58.463 cw(c96.876,58.331) 96.971,58.497 ; STM32F103C8T6.41@106.219,70.393 110.236,66.376 110.236,65.532 v1(109.978,65.274) ; v1@109.891,65.361 ccw(c109.058,66.194) 110.236,66.194 ; v1@110.071,65.181 ccw(c109.671,65.581) 110.236,65.581 ; 110.188,65.484 cw(c109.978,65.694) 109.978,65.397 ccw(c109.978,65.694) 110.188,65.484 ; 110.188,65.484 ccw(c110.398,65.274) 110.101,65.274 cw(c110.398,65.274) 110.188,65.484 ; v1@96.734,58.634 ccw(c97.202,59.102) 97.202,58.44 cw(c97.202,59.102) v1@96.734,58.634
  Bottom Layer w0.254: v1(96.647,58.547) 96.861,58.547 103.588,65.274 v1(109.978,65.274) ; v1@96.647,58.67 ccw(c96.647,59.484) 97.223,58.908 ; 109.681,65.274 cw(c109.681,64.977) 109.891,65.187 ccw(c109.681,64.977) 109.681,65.274 ; 109.681,65.274 ccw(c109.681,65.571) 109.891,65.361 cw(c109.681,65.571) 109.681,65.274
Net2_10: 6050.10 C8.2 | length 10.8
  Top Layer w0.254: C8.2@93.614,55.365 ccw(c93.037,55.942) 93.853,55.942 ccw(c94.669,55.942) C8.2@94.092,55.365 ; C8.2@93.853,55.126 93.853,58.801 94.492,59.44 6050.10@99.454,59.44
Net2_20: 6050.20 C7.2 | length 10.5
  Top Layer w0.254: 6050.20@104.254,58.94 106.668,58.94 106.934,58.674 109.093,58.674 110.109,57.658 C7.2@112.895,57.658 ; C7.2@112.656,57.419 ccw(c112.079,56.842) 112.079,57.658 ccw(c112.079,58.474) C7.2@112.656,57.897
Net4_4: C15.1 CH340.4 | length 7.6
  Top Layer w0.254: C15.1@132.469,82.042 133.426,82.999 CH340.4@133.426,86.589 ; C15.1@132.469,82.405 ccw(c132.469,83.281) 133.089,82.662 ; C15.1@132.807,82.067 cw(c133.563,82.067) 133.028,82.601 ; 133.426,85.448 cw(c133.855,85.448) 133.552,85.752 ccw(c133.855,85.448) 133.426,85.448 ; 133.426,85.448 ccw(c132.997,85.448) 133.3,85.752 cw(c132.997,85.448) 133.426,85.448
Net4_5: CH340.5 USB.3 | length 13.2
  Top Layer w0.254: CH340.5@134.696,86.589 134.696,87.96 135.382,88.646 USB.3@144.907,88.646 ; 134.696,87.729 cw(c134.267,87.729) 134.57,87.426 ccw(c134.267,87.729) 134.696,87.729 ; 134.696,87.729 ccw(c135.125,87.729) 134.822,87.426 cw(c135.125,87.729) 134.696,87.729
Net4_6: CH340.6 USB.2 | length 10.7
  Top Layer w0.254: CH340.6@135.966,86.589 135.966,87.452 136.51,87.996 USB.2@144.907,87.996 ; CH340.6@136.144,87.3 cw(c136.941,87.3) 136.377,87.863
Net4_7: C14.2 CH340.7 Y2.1 | length 35.3
  Top Layer w0.254: CH340.7@137.236,86.589 137.236,72.658 Y2.1@141.351,68.543 145.825,68.543 C14.2@145.923,68.445 ; Y2.1@140.678,68.543 ccw(c139.053,68.543) 140.202,69.692 ccw(c141.351,70.841) Y2.1@141.351,69.216 ; Y2.1@140.932,68.543 ccw(c139.92,68.543) 140.636,69.258 ccw(c141.351,69.974) Y2.1@141.351,68.962 ; Y2.1@141.647,68.247 cw(c142.363,67.531) 142.363,68.543 cw(c142.363,69.555) Y2.1@141.647,68.839 ; Y2.1@141.827,68.067 cw(c142.976,66.918) 142.976,68.543 cw(c142.976,70.168) Y2.1@141.827,69.019 ; 144.845,68.543 cw(c144.845,67.392) C14.2@145.659,68.206 ; 145.319,68.543 ccw(c145.319,69.024) C14.2@145.659,68.684 ; 137.236,85.448 cw(c137.665,85.448) 137.362,85.752 ccw(c137.665,85.448) 137.236,85.448 ; 137.236,85.448 ccw(c136.807,85.448) 137.11,85.752 cw(c136.807,85.448) 137.236,85.448
Net4_8: C16.2 CH340.8 Y2.2 | length 29.3
  Top Layer w0.254: CH340.8@138.506,86.589 138.506,76.288 Y2.2@141.351,73.443 141.449,73.541 C16.2@145.923,73.541 ; Y2.2@140.678,73.443 ccw(c139.053,73.443) 140.202,74.592 ccw(c141.351,75.741) Y2.2@141.351,74.116 ; Y2.2@140.932,73.443 ccw(c139.92,73.443) 140.636,74.158 ccw(c141.351,74.874) Y2.2@141.351,73.862 ; Y2.2@141.647,73.147 cw(c142.599,72.195) 142.599,73.541 ; Y2.2@141.827,72.967 cw(c143.212,71.582) 143.212,73.541 ; Y2.2@141.827,73.919 ccw(c142.739,74.831) 142.739,73.541 ; C16.2@145.659,73.302 ccw(c145.082,72.725) 145.082,73.541 ccw(c145.082,74.357) C16.2@145.659,73.78 ; 138.506,85.448 cw(c138.935,85.448) 138.632,85.752 ccw(c138.935,85.448) 138.506,85.448 ; 138.506,85.448 ccw(c138.077,85.448) 138.38,85.752 cw(c138.077,85.448) 138.506,85.448
Net5_2: 2596.2 D5.2 L1.1 | length 50.9
  Top Layer w1: D5.2@63.824,83.464 ccw(c64.08,83.38) D5.2@63.889,83.19 ; D5.2@63.881,83.198 65.037,82.042 ; D5.2@64.773,83.151 ccw(c65.805,82.81) 65.037,82.042 ; L1.1@67.183,72.737 ccw(c64.066,77.851) 2596.2@70.055,77.851 ; L1.1@67.704,71.883 ccw(c65.151,76.07) 2596.2@70.055,76.07 ; L1.1@68.224,68.529 L1.1@69.311,69.616 ; L1.1@68.224,71.029 ccw(c66.237,74.289) 70.055,74.289 ; 65.037,82.042 69.342,82.042 70.055,81.329 2596.2@70.055,77.851 ; L1.1@69.311,69.616 ccw(c67.515,71.412) L1.1@70.055,71.412 ; L1.1@69.311,69.616 ccw(c67.515,71.412) L1.1@70.055,71.412 ; L1.1@69.311,69.616 ccw(c67.515,71.412) L1.1@70.055,71.412 ; L1.1@69.311,69.616 ccw(c67.515,71.412) L1.1@70.055,71.412 ; L1.1@69.311,69.616 ccw(c67.515,71.412) L1.1@70.055,71.412 ; L1.1@69.311,69.616 ccw(c67.515,71.412) L1.1@70.055,71.412 ; L1.1@69.311,69.616 ccw(c67.515,71.412) L1.1@70.055,71.412 ; L1.1@69.311,69.616 ccw(c67.515,71.412) L1.1@70.055,71.412 ; L1.1@70.055,71.412 2596.2@70.055,77.851
NetBT1_24: BT.24 R3.2 | length 5.5
  Top Layer w0.254: BT.24@134.912,53.834 137.646,53.834 R3.2@137.668,53.856 ; BT.24@135.676,53.57 cw(c136.312,52.933) 136.312,53.834 cw(c136.312,54.734) BT.24@135.676,54.098 ; 136.774,53.834 ccw(c136.774,54.725) R3.2@137.404,54.095 ; 136.88,53.834 cw(c136.88,53.093) R3.2@137.404,53.617
NetD1_1: D1.1 R2.1 | length 5.3
  Top Layer w0.254: D1.1@91.247,56.971 cw(c90.473,56.197) 91.567,56.197 cw(c92.661,56.197) D1.1@91.887,56.971 ; R2.1@91.328,55.238 ccw(c90.751,55.815) 91.567,55.815 ccw(c92.383,55.815) R2.1@91.806,55.238 ; R2.1@91.567,54.999 D1.1@91.567,57.291
NetD2_1: D2.1 R3.1 | length 5.1
  Top Layer w0.254: R3.1@137.668,52.316 139.452,52.316 139.587,52.316 D2.1@139.587,52.451 ; R3.1@137.932,52.077 cw(c138.509,51.5) 138.509,52.316 cw(c138.509,53.132) R3.1@137.932,52.555 ; 138.445,52.316 cw(c138.445,51.154) D2.1@139.267,51.976 ; 138.542,52.316 ccw(c138.542,53.341) D2.1@139.267,52.616
NetD3_1: D3.1 R9.1 | length 6.4
  Top Layer w0.254: D3.1@112.823,49.055 cw(c112.049,48.281) 113.143,48.281 cw(c114.237,48.281) D3.1@113.463,49.055 ; D3.1@113.143,49.53 113.143,47.393 R9.1@113.165,47.371 ; R9.1@112.926,47.635 ccw(c112.402,48.159) 113.143,48.159 cw(c112.402,48.159) R9.1@112.926,47.635 ; 113.143,48.265 ccw(c114.034,48.265) 113.404,47.635 cw(c114.034,48.265) 113.143,48.265
NetD4_1: D4.1 R10.1 | length 5.2
  Top Layer w0.254: D4.1@105.104,49.055 cw(c104.33,48.281) 105.424,48.281 cw(c106.518,48.281) D4.1@105.744,49.055 ; R10.1@105.163,47.635 ccw(c104.533,48.265) 105.424,48.265 ; R10.1@105.402,47.371 105.424,47.393 D4.1@105.424,49.53 ; 105.424,48.159 ccw(c106.165,48.159) R10.1@105.641,47.635
NetP1_2: BOOT.2 R4.1 | length 8
  Top Layer w0.254: BOOT.2@124.654,96.079 cw(c123.591,95.016) 125.095,95.016 cw(c126.599,95.016) BOOT.2@125.536,96.079 ; BOOT.2@124.834,96.259 cw(c124.204,95.629) 125.095,95.629 cw(c125.986,95.629) BOOT.2@125.356,96.259 ; R4.1@124.856,93.846 ccw(c124.279,94.423) 125.095,94.423 ccw(c125.911,94.423) R4.1@125.334,93.846 ; R4.1@124.968,93.607 125.095,93.734 BOOT.2@125.095,96.52
NRF_CE: 2401.3 STM32F103C8T6.39 | length 68.7
  Top Layer w0.254: STM32F103C8T6.39@105.512,69.686 107.061,68.137 107.061,64.389 107.442,64.008 107.442,63.5 v1(107.061,63.119) ; 107.271,63.329 cw(c107.061,63.539) 107.061,63.242 ccw(c107.061,63.539) 107.271,63.329 ; 107.271,63.329 ccw(c107.481,63.119) 107.184,63.119 cw(c107.481,63.119) 107.271,63.329
  Bottom Layer w0.254: v1(107.061,63.119) 107.061,56.642 107.442,56.261 108.973,56.261 109.474,55.76 109.474,41.656 110.655,40.475 141.732,40.475 142.327,41.07 ; 2401.3@142.024,41.563 cw(c141.774,41.07) 142.327,41.07 ; 2401.3@142.327,42.164 142.327,41.07 ; 2401.3@142.63,41.563 ccw(c142.88,41.07) 142.327,41.07 ; 107.061,62.822 cw(c107.358,62.822) 107.148,63.032 ccw(c107.358,62.822) 107.061,62.822 ; 107.061,62.822 ccw(c106.764,62.822) 106.974,63.032 cw(c106.764,62.822) 107.061,62.822
O1: AMOTOR1.1 TB6612.1 TB6612.2 | length 15.2
  Top Layer w0.254: TB6612.2@68.524,53.213 68.453,53.213 68.453,52.705 ; 68.453,52.705 cw(c68.801,52.705) 68.601,52.99 ccw(c68.801,52.705) 68.453,52.705 ; 68.453,52.705 ccw(c68.127,52.705) 68.3,52.981 cw(c68.127,52.705) 68.453,52.705 ; 68.453,52.705 68.524,52.705 ; 68.524,52.705 cw(c68.86,52.705) 68.675,52.985 ccw(c68.86,52.705) 68.524,52.705 ; 68.524,52.705 ccw(c68.188,52.705) 68.373,52.985 cw(c68.188,52.705) 68.524,52.705
  Top Layer w1: AMOTOR1.1@65.913,42.799 65.913,49.784 66.929,50.8 TB6612.1@68.524,50.8 68.524,52.705
O2: AMOTOR1.6 TB6612.5 TB6612.6 | length 17
  Top Layer w1: TB6612.6@71.091,53.213 TB6612.5@71.091,50.8 71.091,47.4 71.882,46.609 77.851,46.609 78.613,45.847 AMOTOR1.6@78.613,42.799
O3: BMOTOR1.1 TB6612.7 TB6612.8 | length 22.7
  Top Layer w1: TB6612.8@72.411,53.213 TB6612.7@72.411,50.8 72.411,48.493 72.898,48.006 84.328,48.006 85.852,46.482 BMOTOR1.1@85.852,42.799
O4: BMOTOR1.6 TB6612.11 TB6612.12 | length 30.7
  Top Layer w1: TB6612.12@75.019,53.213 TB6612.11@75.019,50.8 83.439,50.8 87.249,46.99 96.774,46.99 98.552,45.212 BMOTOR1.6@98.552,42.799
OSC_IN: C3.2 STM32F103C8T6.5 Y1.1 | length 26.9
  Top Layer w0.254: Y1.1@105.098,88.868 ccw(c103.949,90.017) 105.574,90.017 ccw(c107.199,90.017) Y1.1@106.05,88.868 ; Y1.1@105.231,87.813 cw(c104.876,87.212) 105.574,87.212 ; Y1.1@105.278,88.688 ccw(c104.562,89.404) 105.574,89.404 ccw(c106.586,89.404) Y1.1@105.87,88.688 ; C3.2@105.306,92.065 cw(c104.659,91.418) 105.574,91.418 ; C3.2@105.545,92.329 cw(c105.545,92.3) 105.574,92.3 Y1.1@105.574,88.392 105.574,87.212 ; 105.574,91.558 cw(c106.291,91.558) C3.2@105.784,92.065 ; Y1.1@105.917,87.813 ccw(c106.272,87.212) 105.574,87.212 ; STM32F103C8T6.5@107.28,76.12 109.474,78.314 109.474,85.471 108.331,86.614 106.172,86.614 105.574,87.212
OSC_OUT: C4.2 STM32F103C8T6.6 Y1.2 | length 32.5
  Top Layer w0.254: Y1.2@100.198,88.868 ccw(c99.049,90.017) 100.674,90.017 ccw(c102.299,90.017) Y1.2@101.15,88.868 ; Y1.2@100.378,88.688 ccw(c99.662,89.404) 100.674,89.404 ccw(c101.686,89.404) Y1.2@100.97,88.688 ; C4.2@100.464,92.065 cw(c99.957,91.558) 100.674,91.558 ; Y1.2@100.674,87.719 cw(c100.674,86.094) 101.823,87.243 cw(c102.972,88.392) Y1.2@101.347,88.392 ; Y1.2@100.674,87.973 cw(c100.674,86.961) 101.389,87.677 cw(c102.105,88.392) Y1.2@101.093,88.392 ; 100.674,91.418 cw(c101.589,91.418) C4.2@100.942,92.065 ; C4.2@100.703,92.329 100.674,92.3 Y1.2@100.674,88.392 103.087,85.979 107.95,85.979 108.839,85.09 108.839,78.386 STM32F103C8T6.6@106.927,76.474
PA0: AMOTOR1.3 STM32F103C8T6.10 | length 74.3
  Top Layer w0.254: STM32F103C8T6.10@105.512,77.888 106.426,78.802 v1@106.426,80.772
  Bottom Layer w0.254: AMOTOR1.3@70.552,43.24 ccw(c69.489,44.303) 70.993,44.303 ccw(c72.497,44.303) AMOTOR1.3@71.434,43.24 ; AMOTOR1.3@70.732,43.06 ccw(c70.102,43.69) 70.993,43.69 ccw(c71.884,43.69) AMOTOR1.3@71.254,43.06 ; AMOTOR1.3@70.993,42.799 70.993,52.832 73.914,55.753 87.63,55.753 94.107,62.23 94.107,69.749 94.009,69.847 94.009,76.737 98.294,81.022 106.303,81.022 v1(106.426,80.899) ; 106.077,80.963 ccw(c106.192,81.162) v1@106.344,80.991 ; 105.832,81.022 cw(c105.832,80.305) 106.339,80.812 ccw(c105.832,80.305) 105.832,81.022
PA1: AMOTOR1.4 STM32F103C8T6.11 | length 70.8
  Top Layer w0.254: STM32F103C8T6.11@105.159,78.242 106.045,79.128 106.045,80.137 v1(105.791,80.391)
  Bottom Layer w0.254: AMOTOR1.4@73.092,43.24 ccw(c72.029,44.303) 73.533,44.303 ccw(c75.037,44.303) AMOTOR1.4@73.974,43.24 ; AMOTOR1.4@73.272,43.06 ccw(c72.642,43.69) 73.533,43.69 ccw(c74.424,43.69) AMOTOR1.4@73.794,43.06 ; AMOTOR1.4@73.533,42.799 73.533,53.467 75.311,55.245 87.884,55.245 94.615,61.976 94.615,69.96 94.517,70.057 94.517,76.483 98.425,80.391 105.537,80.391 ; v1(105.791,80.391) 105.689,80.493 105.639,80.493 105.537,80.391 ; 105.494,80.391 cw(c105.494,80.094) 105.704,80.304 ccw(c105.494,80.094) 105.494,80.391 ; 105.494,80.391 ccw(c105.494,80.688) 105.704,80.478 cw(c105.494,80.688) 105.494,80.391 ; 105.537,80.391 cw(c105.537,80.19) 105.695,80.315 ccw(c105.537,80.19) 105.537,80.391 ; 105.537,80.391 ccw(c105.537,80.592) 105.695,80.467 cw(c105.537,80.592) 105.537,80.391
PA2: 2401.4 CCD.2 STM32F103C8T6.12 | length 118.4
  Top Layer w0.254: v1(104.14,79.629) 104.805,78.964 STM32F103C8T6.12@104.805,78.595 ; v1(113.767,79.629) 115.341,78.054 115.341,60.782 v1(123.749,52.375) ; 104.35,79.419 cw(c104.56,79.629) 104.263,79.629 ccw(c104.56,79.629) 104.35,79.419 ; 104.35,79.419 ccw(c104.14,79.209) 104.14,79.506 cw(c104.14,79.209) 104.35,79.419 ; 113.977,79.419 cw(c114.187,79.629) 113.89,79.629 ccw(c114.187,79.629) 113.977,79.419 ; 113.977,79.419 ccw(c113.767,79.209) 113.767,79.506 cw(c113.767,79.209) 113.977,79.419 ; 123.539,52.585 cw(c123.329,52.375) 123.626,52.375 ccw(c123.329,52.375) 123.539,52.585 ; 123.539,52.585 ccw(c123.749,52.795) 123.749,52.498 cw(c123.749,52.795) 123.539,52.585
  Bottom Layer w0.254: v1(104.14,79.629) v1(113.767,79.629) ; v1(123.749,52.375) 129.515,46.609 140.382,46.609 2401.4@142.327,44.664 141.497,44.664 ; CCD.2@126.885,42.418 cw(c125.381,42.418) 126.444,41.354 cw(c127.508,40.291) CCD.2@127.508,41.795 ; CCD.2@127.139,42.418 cw(c126.248,42.418) 126.878,41.788 cw(c127.508,41.158) CCD.2@127.508,42.049 ; CCD.2@127.508,42.418 126.377,41.287 124.46,41.287 123.825,41.922 123.825,42.926 124.968,44.069 138.752,44.069 139.338,43.483 140.316,43.483 ; 141.577,44.237 ccw(c141.543,45.404) 2401.4@142.392,44.603 ; 141.605,43.993 ccw(c141.565,45.384) 2401.4@142.576,44.429 ; 2401.4@141.654,44.664 ccw(c140.029,44.664) 141.178,45.813 ccw(c142.327,46.962) 2401.4@142.327,45.337 ; 2401.4@141.908,44.664 ccw(c140.896,44.664) 141.612,45.379 ccw(c142.327,46.095) 2401.4@142.327,45.083 ; 104.437,79.629 cw(c104.437,79.926) 104.227,79.716 ccw(c104.437,79.926) 104.437,79.629 ; 104.437,79.629 ccw(c104.437,79.332) 104.227,79.542 cw(c104.437,79.332) 104.437,79.629 ; 113.47,79.629 cw(c113.47,79.332) 113.68,79.542 ccw(c113.47,79.332) 113.47,79.629 ; 113.47,79.629 ccw(c113.47,79.926) 113.68,79.716 cw(c113.47,79.926) 113.47,79.629 ; 124.046,52.375 cw(c124.046,52.672) 123.836,52.462 ccw(c124.046,52.672) 124.046,52.375 ; 124.046,52.375 ccw(c124.046,52.078) 123.836,52.288 cw(c124.046,52.078) 124.046,52.375 ; 140.316,43.483 cw(c141.715,42.084) 142.172,44.009 ccw(c141.715,42.084) 140.316,43.483 ; 140.316,43.483 141.497,44.664 ; 141.497,44.664 cw(c141.497,44.489) 141.669,44.525 ccw(c141.497,44.489) 141.497,44.664 ; 141.497,44.664 ccw(c141.497,44.839) 141.669,44.803 cw(c141.497,44.839) 141.497,44.664 ; 140.638,43.805 cw(c141.839,42.604) 142.23,44.256 ccw(c141.839,42.604) 140.638,43.805 ; 140.96,44.127 cw(c141.962,43.124) 142.289,44.503 ccw(c141.962,43.124) 140.96,44.127 ; 141.282,44.448 cw(c142.085,43.645) 142.348,44.751 ccw(c142.085,43.645) 141.282,44.448
PA3: 2401.8 CCD.3 STM32F103C8T6.13 | length 124.1
  Top Layer w0.254: v1(101.346,83.693) 101.346,80.216 STM32F103C8T6.13@102.967,78.595 ; v1(109.626,91.44) 116.942,84.125 116.942,60.452 124.968,52.426 CCD.3@124.968,42.418 ; CCD.3@124.527,42.859 ccw(c123.464,43.922) 124.968,43.922 ccw(c126.472,43.922) CCD.3@125.409,42.859 ; CCD.3@124.707,42.679 ccw(c124.077,43.309) 124.968,43.309 ccw(c125.859,43.309) CCD.3@125.229,42.679 ; 101.346,83.396 cw(c101.643,83.396) 101.433,83.606 ccw(c101.643,83.396) 101.346,83.396 ; 101.346,83.396 ccw(c101.049,83.396) 101.259,83.606 cw(c101.049,83.396) 101.346,83.396 ; 109.836,91.23 cw(c110.046,91.44) 109.749,91.44 ccw(c110.046,91.44) 109.836,91.23 ; 109.836,91.23 ccw(c109.626,91.02) 109.626,91.317 cw(c109.626,91.02) 109.836,91.23
  Bottom Layer w0.254: v1(101.346,83.693) 101.448,83.591 102.972,83.591 103.353,83.972 103.353,90.932 103.861,91.44 v1(109.626,91.44) ; v1@101.433,83.78 ccw(c101.888,84.235) 101.888,83.591 ; CCD.3@124.832,42.446 cw(c125.788,42.25) 125.536,43.193 ; CCD.3@124.968,42.418 126.111,43.561 134.662,43.561 137.24,40.983 140.805,40.983 141.008,41.186 141.008,42.926 141.516,43.434 146.097,43.434 2401.8@147.327,44.664 ; CCD.3@124.996,42.282 ccw(c124.8,43.238) 125.743,42.986 ; 2401.8@146.654,44.664 cw(c145.029,44.664) 146.178,43.515 cw(c147.327,42.366) 2401.8@147.327,43.991 ; 2401.8@146.908,44.664 cw(c145.896,44.664) 146.612,43.949 cw(c147.327,43.233) 2401.8@147.327,44.245 ; 109.329,91.44 cw(c109.329,91.143) 109.539,91.353 ccw(c109.329,91.143) 109.329,91.44 ; 109.329,91.44 ccw(c109.329,91.737) 109.539,91.527 cw(c109.329,91.737) 109.329,91.44 ; 125.598,43.048 cw(c124.968,43.678) 124.968,42.787 ccw(c124.968,43.678) 125.598,43.048 ; 125.598,43.048 ccw(c126.228,42.418) 125.337,42.418 cw(c126.228,42.418) 125.598,43.048 ; 126.032,43.482 cw(c124.968,44.545) 124.968,43.041 ccw(c124.968,44.545) 126.032,43.482 ; 126.032,43.482 ccw(c127.095,42.418) 125.591,42.418 cw(c127.095,42.418) 126.032,43.482
PA4: C21.2 R11.1 R12.2 STM32F103C8T6.14 | length 61.8
  Top Layer w0.254: R11.1@61.603,71.374 61.603,72.169 ; v1(62.484,73.05) 61.603,72.169 ; v1(100.711,84.201) 100.711,80.144 STM32F103C8T6.14@102.613,78.242 ; 61.603,72.169 cw(c60.894,72.169) 61.374,71.648 ccw(c60.894,72.169) 61.603,72.169 ; 61.603,72.169 ccw(c62.312,72.169) 61.832,71.648 cw(c62.312,72.169) 61.603,72.169 ; 62.274,72.84 cw(c62.484,72.63) 62.484,72.927 ccw(c62.484,72.63) 62.274,72.84 ; 62.274,72.84 ccw(c62.064,73.05) 62.361,73.05 cw(c62.064,73.05) 62.274,72.84 ; 100.711,83.904 cw(c101.008,83.904) 100.798,84.114 ccw(c101.008,83.904) 100.711,83.904 ; 100.711,83.904 ccw(c100.414,83.904) 100.624,84.114 cw(c100.414,83.904) 100.711,83.904
  Top Layer w1: R12.2@61.603,67.31 C21.2@61.603,69.342 R11.1@61.603,71.374
  Bottom Layer w0.254: v1(62.484,73.05) 87.528,73.05 98.679,84.201 v1(100.711,84.201) ; 62.781,73.05 cw(c62.781,73.347) 62.571,73.137 ccw(c62.781,73.347) 62.781,73.05 ; 62.781,73.05 ccw(c62.781,72.753) 62.571,72.963 cw(c62.781,72.753) 62.781,73.05 ; 100.414,84.201 cw(c100.414,83.904) 100.624,84.114 ccw(c100.414,83.904) 100.414,84.201 ; 100.414,84.201 ccw(c100.414,84.498) 100.624,84.288 cw(c100.414,84.498) 100.414,84.201
PA7: 2401.6 CCD.1 STM32F103C8T6.17 | length 138.1
  Top Layer w0.254: v1(98.552,82.931) 98.552,80.182 STM32F103C8T6.17@101.553,77.181 ; CCD.1@130.048,41.795 cw(c130.048,40.291) 131.112,41.354 cw(c132.175,42.418) CCD.1@130.671,42.418 ; CCD.1@130.048,42.049 cw(c130.048,41.158) 130.678,41.788 cw(c131.308,42.418) CCD.1@130.417,42.418 ; CCD.1@130.048,42.418 132.004,40.462 144.856,40.462 146.088,41.694 ; 2401.6@144.827,43.991 cw(c144.827,42.366) 145.976,43.515 cw(c147.125,44.664) 2401.6@145.5,44.664 ; 2401.6@144.827,44.245 cw(c144.827,43.233) 145.542,43.949 cw(c146.258,44.664) 2401.6@145.246,44.664 ; 2401.6@144.827,44.664 146.025,43.466 146.025,41.758 146.088,41.694 ; v1@148.808,81.32 cw(c148.305,80.817) 149.016,80.817 ; v1(148.895,81.407) 149.016,81.286 149.016,41.625 148.361,40.97 146.812,40.97 146.088,41.694 ; 98.552,82.634 cw(c98.849,82.634) 98.639,82.844 ccw(c98.849,82.634) 98.552,82.634 ; 98.552,82.634 ccw(c98.255,82.634) 98.465,82.844 cw(c98.255,82.634) 98.552,82.634
  Bottom Layer w0.254: v1(98.552,82.931) 98.679,83.058 136.398,83.058 140.06,86.72 145.386,86.72 146.66,85.446 146.66,83.642 v1(148.895,81.407) ; v1@98.632,83.024 ccw(c98.788,83.206) 98.907,82.999 ; 148.685,81.617 cw(c148.475,81.407) 148.772,81.407 ccw(c148.475,81.407) 148.685,81.617 ; 148.685,81.617 ccw(c148.895,81.827) 148.895,81.53 cw(c148.895,81.827) 148.685,81.617 ; v1@98.639,82.844 cw(c99.156,82.327) 99.156,83.058 ccw(c99.156,82.327) v1@98.639,82.844
PA9: CH340.3 STM32F103C8T6.30 USART1.2 | length 114.6
  Top Layer w0.254: v1(98.552,68.326) 98.552,68.58 ; STM32F103C8T6.30@100.845,71.1 100.845,71 98.552,68.707 98.552,68.58 ; v1(117.983,69.901) 117.983,96.596 119.558,98.171 140.208,98.171 140.843,97.536 140.843,96.52 ; USART1.2@141.776,96.104 ccw(c140.843,95.265) 140.843,96.52 ; USART1.2@141.776,96.936 cw(c140.843,97.775) 140.843,96.52 ; USART1.2@141.965,96.273 ccw(c141.413,95.777) 141.413,96.52 ccw(c141.413,97.263) USART1.2@141.965,96.767 ; USART1.2@142.24,96.52 140.843,96.52 ; v1@98.476,68.422 ccw(c98.351,68.58) 98.552,68.58 ; v1@98.476,68.422 ccw(c98.351,68.58) 98.552,68.58 ; v1@98.476,68.422 ccw(c98.351,68.58) 98.552,68.58 ; v1@98.476,68.422 ccw(c98.351,68.58) 98.552,68.58 ; 98.552,68.58 ccw(c98.753,68.58) v1@98.628,68.422 ; 98.552,68.58 ccw(c98.753,68.58) v1@98.628,68.422 ; 98.552,68.58 ccw(c98.753,68.58) v1@98.628,68.422 ; 98.552,68.58 ccw(c98.753,68.58) v1@98.628,68.422 ; 98.552,68.623 cw(c98.255,68.623) 98.465,68.413 ccw(c98.255,68.623) 98.552,68.623 ; 98.552,68.623 ccw(c98.849,68.623) 98.639,68.413 cw(c98.849,68.623) 98.552,68.623 ; 117.983,70.198 cw(c117.686,70.198) 117.896,69.988 ccw(c117.686,70.198) 117.983,70.198 ; 117.983,70.198 ccw(c118.28,70.198) 118.07,69.988 cw(c118.28,70.198) 117.983,70.198 ; CH340.3@132.03,87.426 ccw(c131.727,87.729) 132.156,87.729 ; CH340.3@132.03,87.426 ccw(c131.727,87.729) 132.156,87.729 ; CH340.3@132.03,87.426 ccw(c131.727,87.729) 132.156,87.729 ; CH340.3@132.03,87.426 ccw(c131.727,87.729) 132.156,87.729 ; 132.156,87.729 ccw(c132.585,87.729) CH340.3@132.282,87.426 ; 132.156,87.729 ccw(c132.585,87.729) CH340.3@132.282,87.426 ; 132.156,87.729 ccw(c132.585,87.729) CH340.3@132.282,87.426 ; 132.156,87.729 ccw(c132.585,87.729) CH340.3@132.282,87.426 ; 137.959,89.23 138.252,89.23 140.843,91.821 140.843,96.52 ; 137.959,89.23 132.994,89.23 132.156,88.392 CH340.3@132.156,86.589 132.156,88.468 132.918,89.23 137.959,89.23
  Bottom Layer w0.254: v1@98.491,68.219 cw(c98.139,67.611) 98.818,67.793 ; v1(98.552,68.326) 98.552,68.097 99.466,67.183 115.265,67.183 v1(117.983,69.901) ; 117.773,69.691 cw(c117.983,69.481) 117.983,69.778 ccw(c117.983,69.481) 117.773,69.691 ; 117.773,69.691 ccw(c117.563,69.901) 117.86,69.901 cw(c117.563,69.901) 117.773,69.691 ; v1@98.675,68.326 ccw(c99.524,68.326) 98.924,67.726 cw(c99.524,68.326) v1@98.675,68.326